# EAGLE board bp_pic_programmer_v2 (EAGLE 5.11)
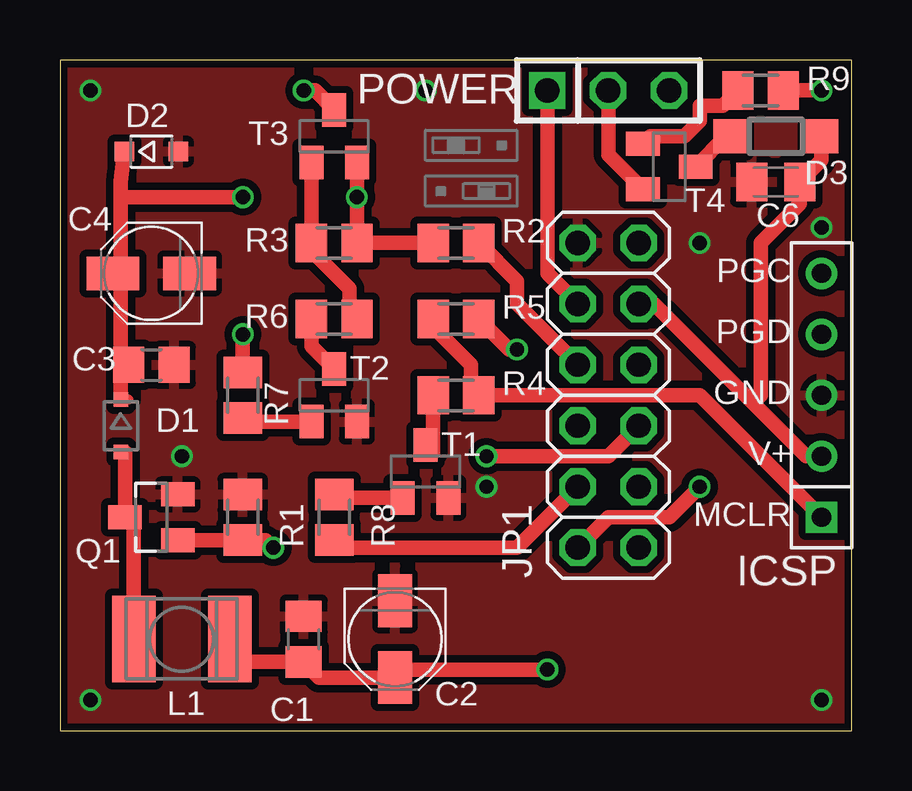
[diagram p0: board, top side]
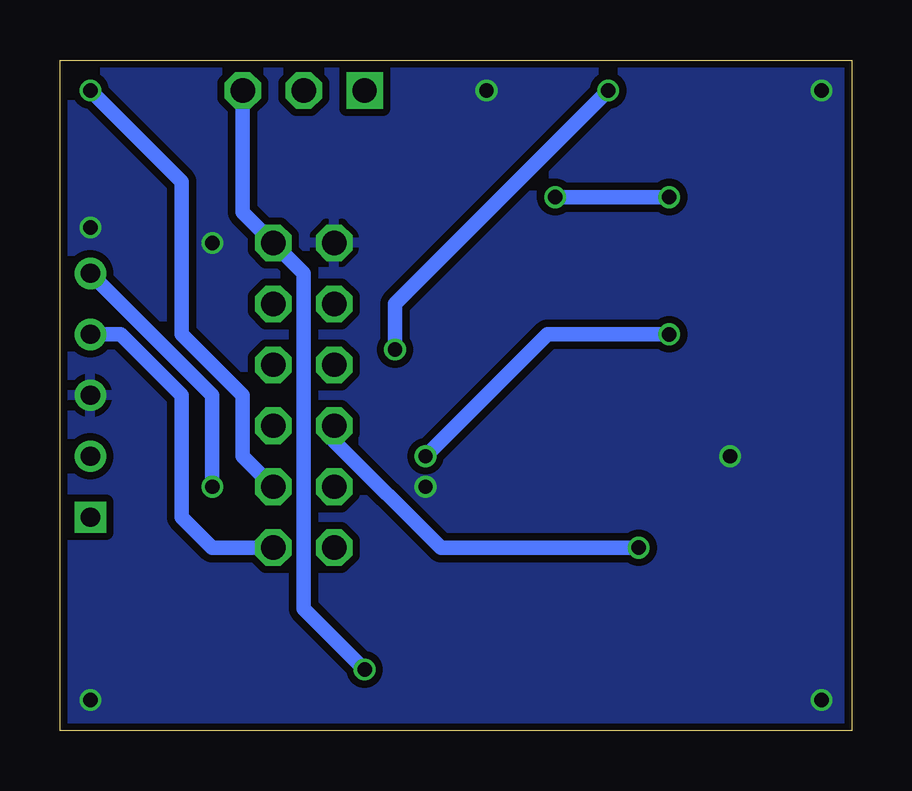
[diagram p1: board, bottom side, seen from below]

Size 33.02 x 27.94 mm. Coordinates in mm from the lower left corner, seen from the top.
Outline: 0,0 33.02,0 33.02,27.94 0,27.94 0,0
Copper layers (1*16): Top 0.035mm / dielectric 1.5mm / Bottom 0.035mm
Design rules "Fusion_eagle_rule_v1.1": minimum track width 6mil, minimum drill 12mil, track to track 6mil, track to pad 6mil, pad to pad 6mil, via to via 6mil, smd to smd 0mil, copper to edge 10mil, drill to drill 10mil, minimum pad ring 10mil, minimum via ring 6mil, stop-mask expansion 2mil, vias tented up to drill 100mil, thermal gap 10mil

## Footprints (pad centres in the part's own frame; a part is rotated, then mirrored left to right if it is on the bottom)
C805 = smd 1.3 x 1.5: 1 -0.95,0; 2 0.95,0
CASE_B = smd 2.2 x 1.4: + 1.6,0; - -1.6,0
C0805K = smd 1.3 x 1.6: 1 -1,0; 2 1,0
DO323 = smd 0.6 x 0.6: A 1.1,0; C -1.1,0
SOD-323F = smd 0.8 x 0.8: A 1.125,0; C -1.125,0
SOD123 = smd 1.4 x 1.4: A 1.9,0; C -1.9,0
M1X5 = drill 0.8 square: 1 -5.08,0 | drill 0.8 round: 2 -2.54,0; 3 0,0; 4 2.54,0; 5 5.08,0
2X06 = drill 1.016 octagon: 1 -6.35,-1.27; 2 -6.35,1.27; 3 -3.81,-1.27; 4 -3.81,1.27; 5 -1.27,-1.27; 6 -1.27,1.27; 7 1.27,-1.27; 8 1.27,1.27; 9 3.81,-1.27; 10 3.81,1.27; 11 6.35,-1.27; 12 6.35,1.27
L4532P = smd 1.8 x 3.6: 1 -2,0; 2 2,0
1X03 = drill 1.016 square: 1 -2.54,0 | drill 1.016 octagon: 2 0,0; 3 2.54,0
SOT23 = smd 1 x 1.4: 1 -0.95,-1.1; 2 0.95,-1.1; 3 0,1.1
M0805 = smd 1.3 x 1.6: 1 -0.95,0; 2 0.95,0
SOT23-BEC@1 = smd 1 x 1.4: B -0.95,-1.1; C 0,1.1; E 0.95,-1.1

## Placement (x,y rotation side)
C1  0.1uF  [C805]  10.16,3.81 90 top
C2  47uF  [CASE_B]  13.97,3.81 270 top
C3  0.1uF  [C805]  3.81,15.24 0 top
C4  33uF  [CASE_B]  3.81,19.05 180 top
C6  0.1uF/50V  [C0805K]  29.84,22.86 180 top
D1  Schottky  [DO323]  2.54,12.7 270 top
D2  13V  [SOD-323F]  3.81,24.13 0 top
D3  1N5819, 20V, 1A+  [SOD123]  29.84,24.77 180 top
ICSP  CON_HEADER_1X05-PTH  [M1X5]  31.75,13.97 90 top
JP1  PINSHRD-PTH-2X06  [2X06]  22.86,13.97 90 top
L1  680uH/0.12A  [L4532P]  5.08,3.81 0 top
POWER  [1X03]  22.86,26.67 0 top
Q1  Vth < 3.3V  [SOT23]  3.81,8.89 90 top
R1  1M  [M0805]  7.62,8.89 270 top
R2  20K  [M0805]  16.51,20.32 180 top
R3  100K  [M0805]  11.43,20.32 0 top
R4  100R  [M0805]  16.51,13.97 0 top
R5  10K  [M0805]  16.51,17.14 0 top
R6  10K  [M0805]  11.43,17.14 0 top
R7  10K  [M0805]  7.62,13.97 270 top
R8  10K  [M0805]  11.43,8.89 90 top
R9  10K  [M0805]  29.21,26.67 180 top
T1  NPN, 200mA+, 30+hfe  [SOT23-BEC@1]  15.24,10.79 0 top
T2  NPN, 200mA+, 30+hfe  [SOT23-BEC@1]  11.43,13.97 0 top
T3  PNP, 200mA+, 30hfe  [SOT23-BEC@1]  11.43,24.77 0 top
T4  PNP, 1A+, 40+ hef  [SOT23-BEC@1]  25.4,23.5 270 top
U$1  JUMP3_DESC  [JUMP3_DESC]  20.32,23.11 0 top

## Library data of the parts
C1-C4 D1 D2 ICSP Q1 T1-T4 = dp_devices
C6 L1 R1-R9 = rcl
D3 = diode
JP1 = pinhead
POWER = pinhead-2
U$1 = dp_devices; LEFT: 3V3; RIGHT: 5V

## Nets
ADC: JP1.8 R2.1
AUX2: JP1.7
GND: C1.2 C2.- C3.2 C4.- C6.2 D2.A ICSP.3 JP1.12 Q1.2 R1.1 T1.E T2.E
MCLR: JP1.4 R8.1
MISO: JP1.3 R9.1
N$1: R9.2 T4.B
N$2: D1.A L1.1 Q1.3
N$3: R4.1 T1.C
N$4: R5.2 T3.C
N$5: R6.1 T2.C
N$6: R3.1 R6.2 T3.B
N$7: R8.2 T1.B
N$8: R7.2 T2.B
N$10: D3.A T4.C
PGC: ICSP.5 JP1.2
PGD: ICSP.4 JP1.1
PWM: JP1.6 Q1.1 R1.2
SWV33: JP1.10 POWER.1
SWV50: C1.1 C2.+ JP1.11 L1.2 POWER.3
V_BOOST: C3.1 C4.+ D1.C D2.C R2.2 R3.2 T3.E
VDD_SWITCH: POWER.2 T4.E
VPP: ICSP.1 R4.2 R5.1
VPPEN: JP1.5 R7.1
VTARGET: C6.1 D3.C ICSP.2 JP1.9

## Tracks (layer width: path | path; a pad name or v marks a point on that pad's centre or on a via)
ADC
  Top 0.61: 17.78,20.32 R2.1 19.05,18.73 19.05,17.78 JP1.8
GND  (via drill 0.6)
  other vias: 1.27,1.27 1.27,26.67 5.08,11.43 31.75,1.27 17.78,10.16 15.24,26.67 26.67,20.32 31.75,20.95
  pour Top (isolate 0.305): 0,0 0,27.94 33.02,27.94 33.02,0
  pour Bottom (isolate 0.305): 0,0 0,27.94 33.02,27.94 33.02,0
MCLR
  Top 0.61: JP1.4 19.05,7.62 11.75,7.62 R8.1
MISO  (via drill 0.6)
  Top 0.61: v31.75,26.67 R9.1
  Bottom 0.61: JP1.3 25.4,11.43 25.4,13.97 27.94,16.51 27.94,22.86 v31.75,26.67
N$1
  Top 0.61: T4.B 24.62,24.77 26.04,24.77 26.67,25.4 26.67,26.04 27.62,26.04 R9.2
N$2
  Top 0.406: 2.71,11.6 D1.A | 3.08,8.89 Q1.3
  Top 0.61: Q1.3 2.71,11.6 | L1.1 3.08,8.89
N$3
  Top 0.61: T1.C 15.56,11.58 R4.1
N$4  (via drill 0.6)
  Top 0.61: v19.05,15.88 18.73,15.88 R5.2 | v10.16,26.67 10.62,26.67 T3.C
  Bottom 0.61: v10.16,26.67 19.05,17.78 v19.05,15.88
N$5
  Top 0.61: T2.C 10.48,16.02 R6.1
N$6
  Top 0.406: R6.2 12.06,17.46 | 10.48,20 R3.1
  Top 0.61: R3.1 T3.B | 12.06,17.46 12.06,18.41 10.48,20
N$7
  Top 0.61: T1.B 11.57,9.7 R8.2
N$8
  Top 0.406: R7.2 7.77,12.87
  Top 0.61: 7.77,12.87 T2.B
N$10
  Top 0.61: T4.C 27.77,24.77 D3.A
PGC  (via drill 0.6)
  Top 0.61: JP1.2 22.86,8.89 25.4,8.89 v26.67,10.16
  Bottom 0.61: v26.67,10.16 26.67,13.97 ICSP.5
PGD
  Bottom 0.61: JP1.1 26.67,7.62 27.94,8.89 27.94,13.97 30.48,16.51 ICSP.4
PWM  (via drill 0.6)
  Top 0.61: Q1.1 R1.2 8.57,7.94 v8.89,7.62
  Bottom 0.61: JP1.6 21.59,12.06 17.14,7.62 v8.89,7.62
SWV33
  Top 0.61: POWER.1 20.32,19.05 JP1.10
SWV50  (via drill 0.6)
  Top 0.406: L1.2 8.03,2.86
  Top 0.61: 8.03,2.86 C1.1 10.81,2.21 C2.+ 14.3,2.54 v20.32,2.54
  Bottom 0.61: POWER.3 25.4,21.59 JP1.11 22.86,19.05 22.86,5.08 v20.32,2.54
V_BOOST  (via drill 0.6)
  Top 0.406: 2.54,19.05 C4.+ | C3.1 2.54,15.24 | D1.C 2.86,13.8
  Top 0.61: D2.C 2.54,22.86 2.54,22.23 | 2.54,15.24 2.54,19.05 2.54,22.23 | T3.E v12.38,22.23 R3.2 R2.2 15.24,20.64 | C3.1 2.54,14.92 D1.C | 2.54,22.23 v7.62,22.23
  Bottom 0.61: v7.62,22.23 v12.38,22.23
VDD_SWITCH
  Top 0.61: T4.E 22.86,23.98 POWER.2
VPP
  Top 0.406: R4.2 17.14,14.29 | 15.56,16.82 R5.1
  Top 0.61: 17.14,14.29 17.14,15.24 15.56,16.82 | R4.2 26.67,13.97 ICSP.1
VPPEN  (via drill 0.6)
  Top 0.61: JP1.5 22.86,11.43 v17.78,11.43 | R7.1 v7.62,16.51
  Bottom 0.61: v17.78,11.43 12.7,16.51 v7.62,16.51
VTARGET
  Top 0.61: JP1.9 24.77,17.78 28.89,13.65 | 28.89,13.65 31.11,11.43 ICSP.2 | D3.C 31.75,23.76 C6.1 30.84,21.95 29.21,20.32 29.21,13.97 28.89,13.65

## Text on the board
tPlace: PGC | PGD | GND | V+ | MCLR